# Altium PCB DRV8701EPCB.PcbDoc
Units mil, origin at the board's own origin, x right, y up, seen from the top; angles counter-clockwise.
Board outline 2655 x 1290 mil, 4 copper layers (Top, GND2, POWER, BOTTOM), stack 23.756 mil thick; 40 components, 38 nets, 242 pads, 136 vias.
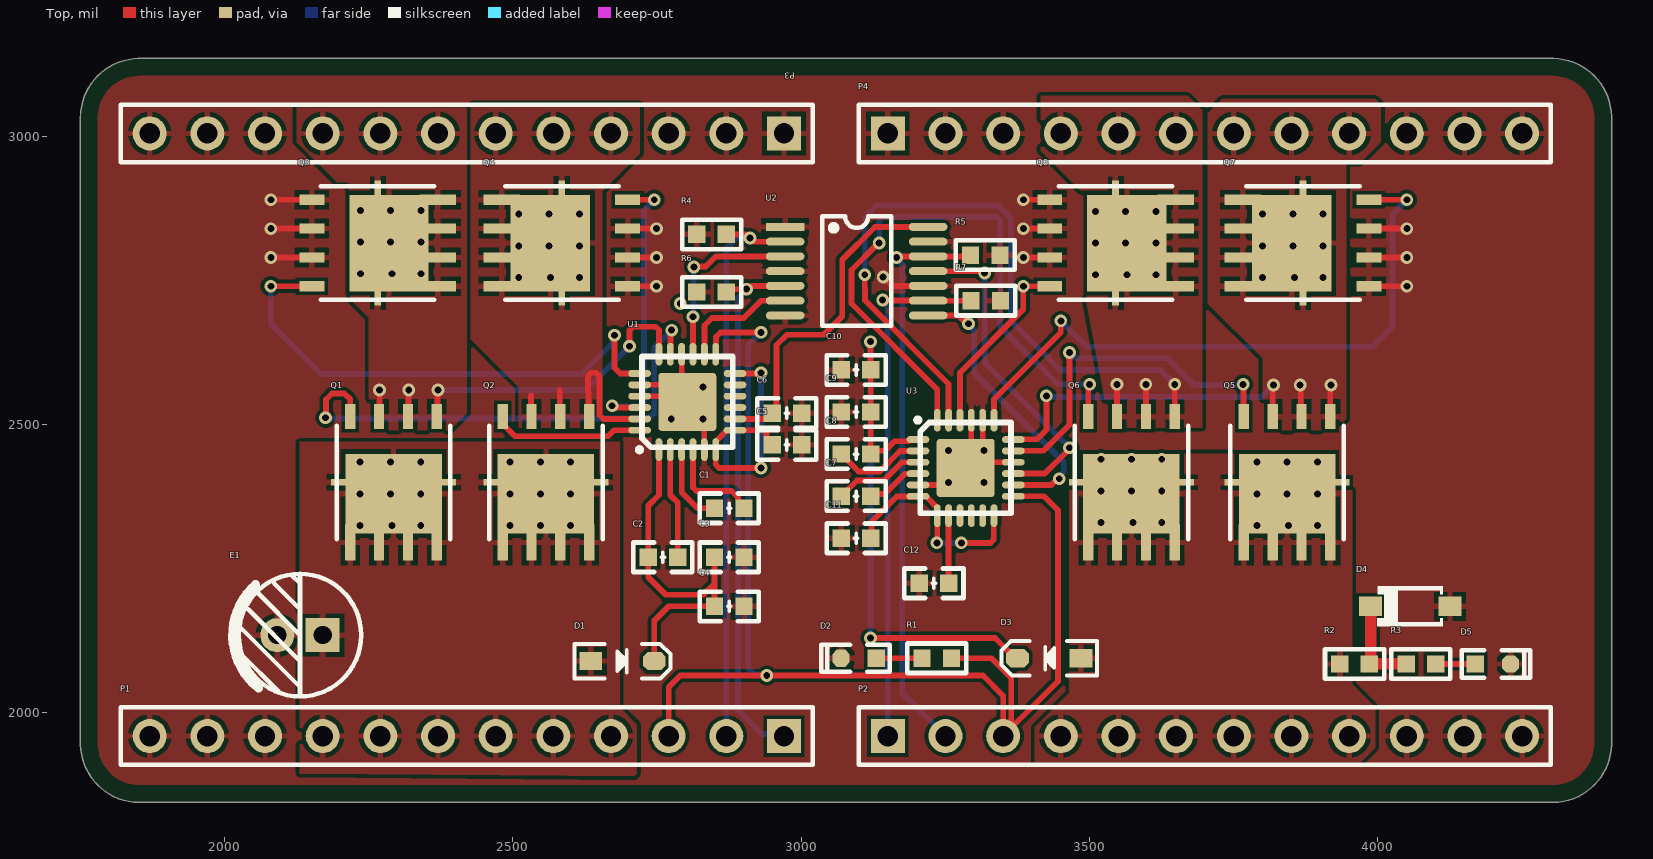
[diagram p0: Top view]
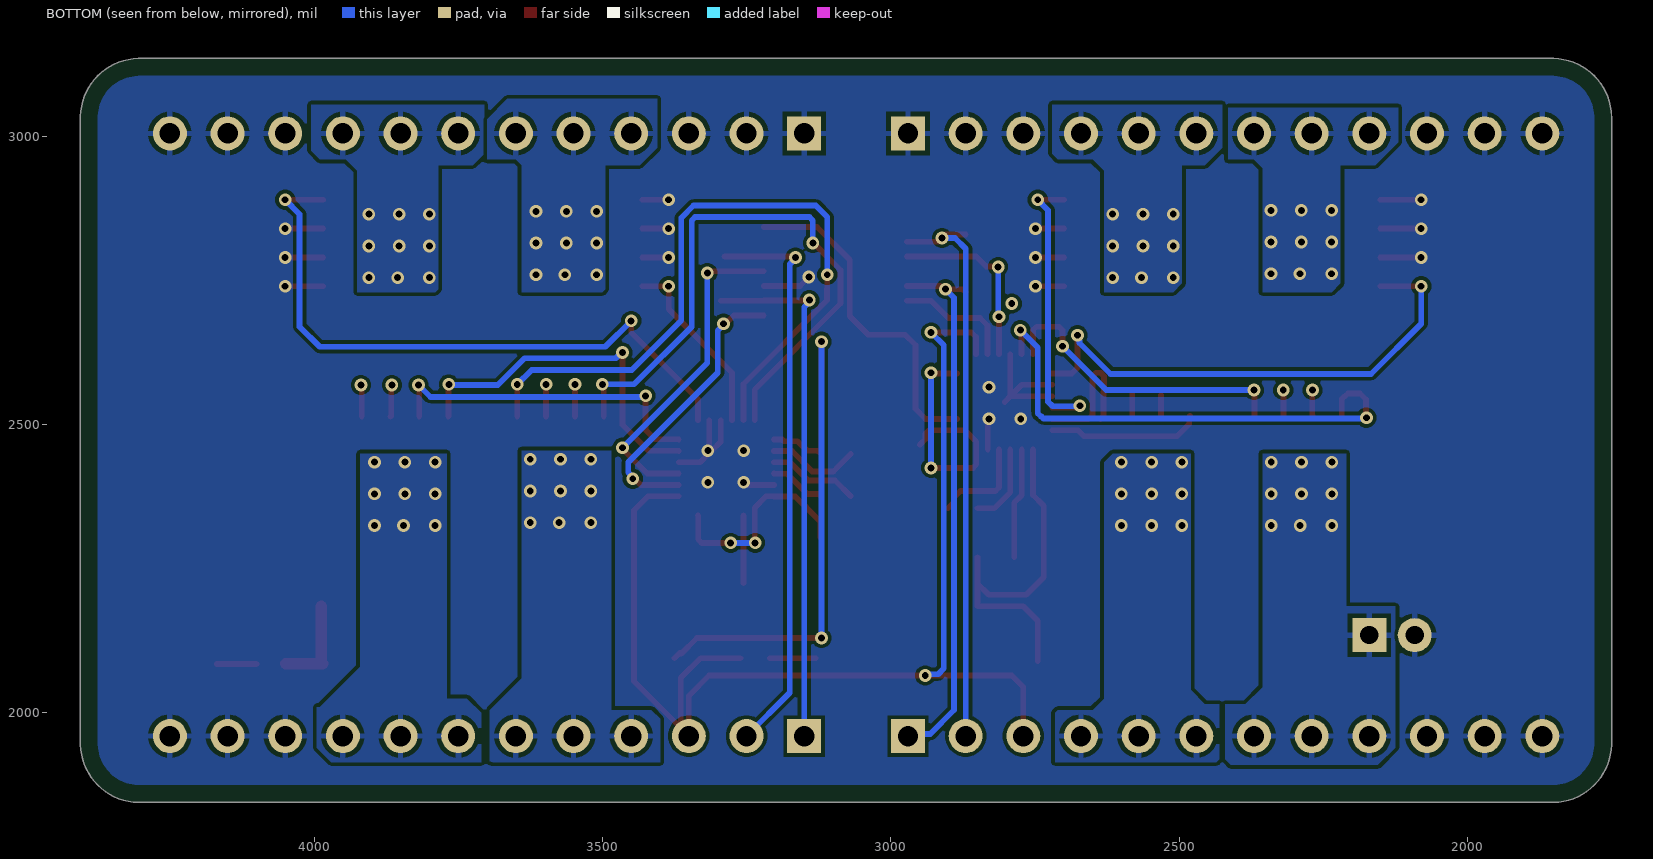
[diagram p1: BOTTOM view, seen from below]
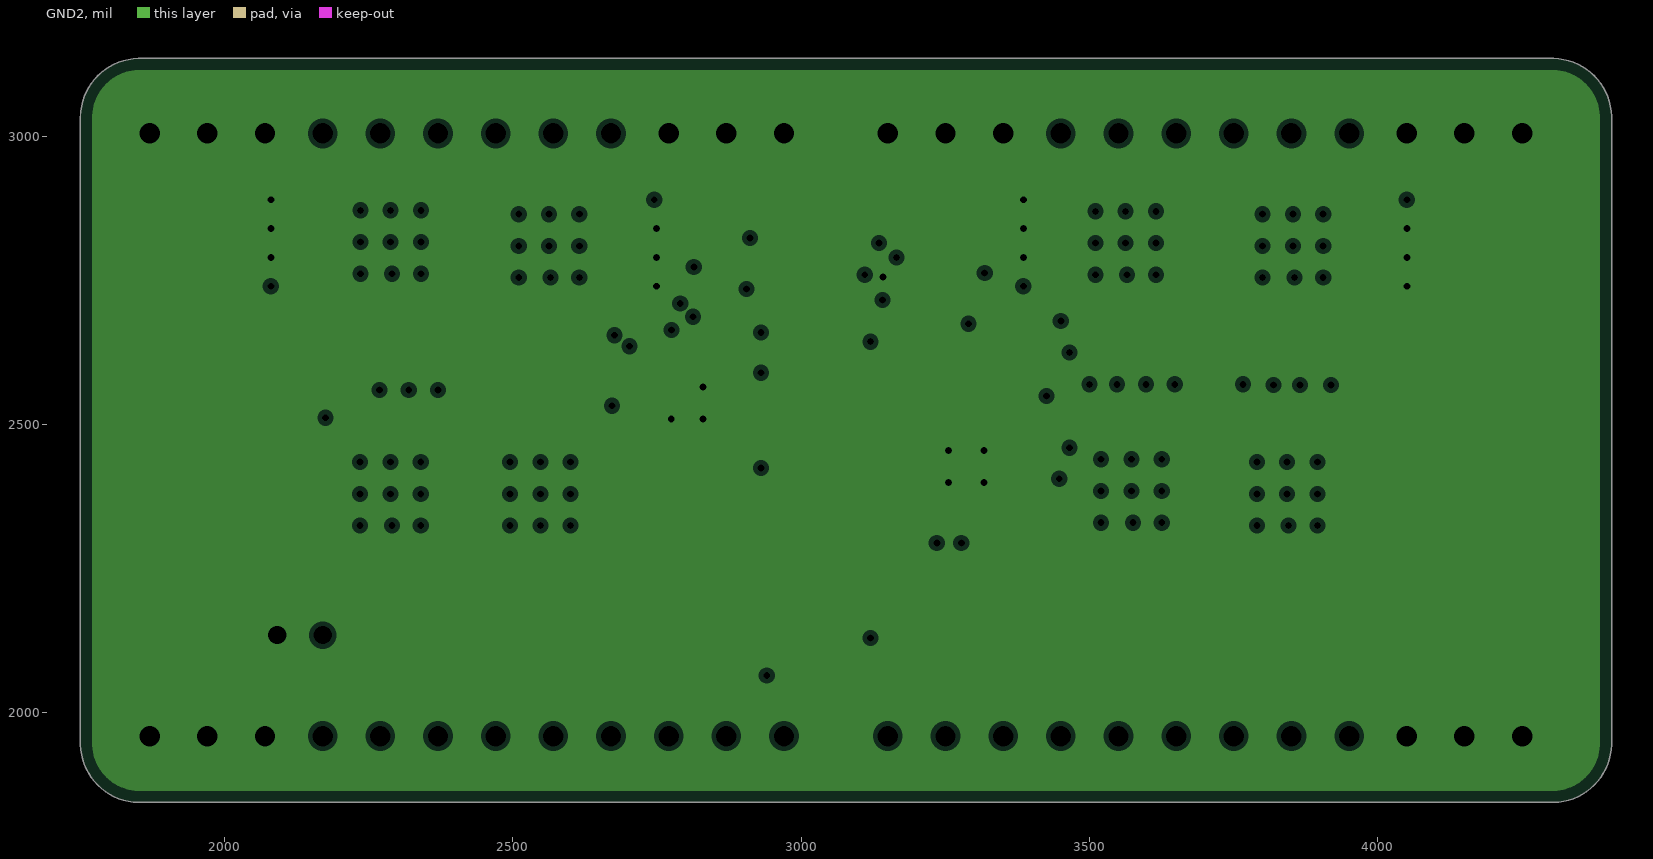
[diagram p2: GND2, clearances drawn from the general rule]
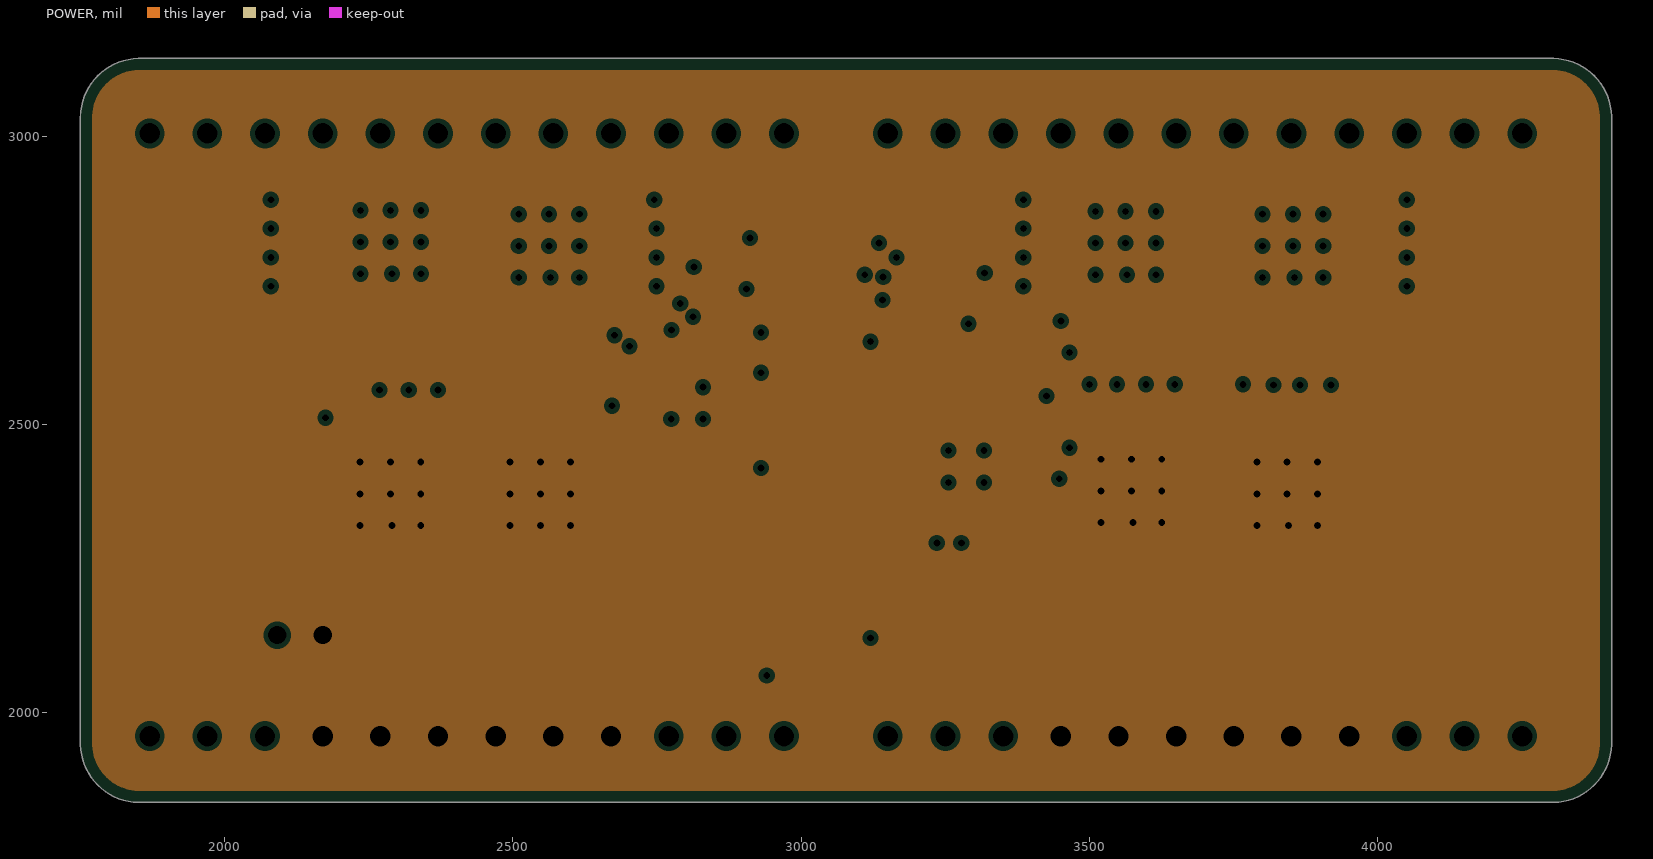
[diagram p3: POWER, clearances drawn from the general rule]
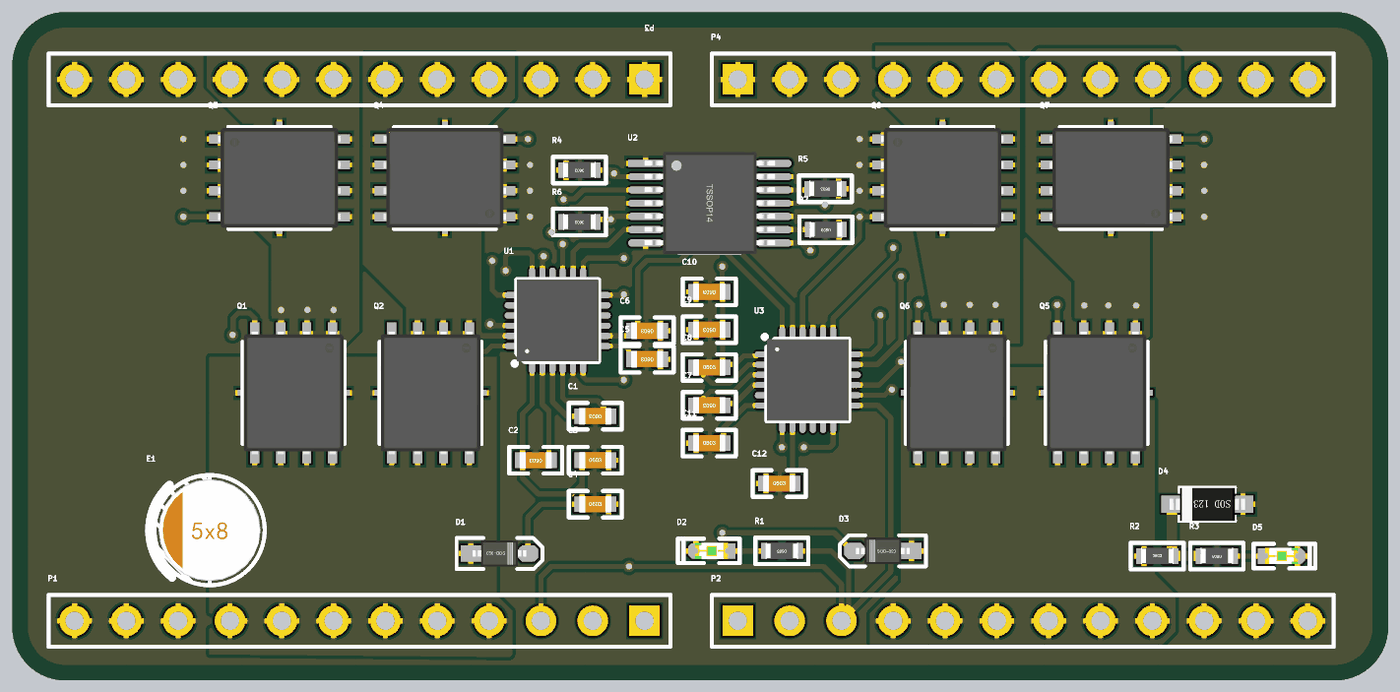
[diagram p4: 3D render of the assembled board from above, using the file's embedded part models]

## Layer stack, top to bottom
Top Solder: solder mask 0.4, Solder Resist, Dk 3.5
Top: signal copper 1.4
Dielectric 2: prepreg 2.8, PP-006, Dk 4.1
GND2: plane copper 1.378, net GND
Dielectric 1: dielectric 12.6, FR-4, Dk 4.8
POWER: plane copper 1.378, net VM
Dielectric 3: prepreg 2.8, PP-006, Dk 4.1
BOTTOM: signal copper 1.4
Bottom Solder: solder mask 0.4, Solder Resist, Dk 3.5

## Board outline
1750,1944.99 1750,3035 cw(c1852.5,3032.5) 1849.99,3135 4305,3135 cw(c4302.5,3032.5) 4405,3035.01 4405,1945 cw(c4302.5,1947.5) 4305.01,1845 1850,1845 cw(c1852.5,1947.5)

## Design rules (kind name [scope] priority, off if disabled: settings)
BoardOutlineClearance [All] p1: gap=30 ignorepadtopadclearanceinfootprint=FALSE
Clearance [All] p1: gap=6 ignorepadtopadclearanceinfootprint=FALSE
PlaneClearance [All] p1: clearance=8
PlaneConnect [All] p1: pad.planeconnectstyle=Direct pad.reliefexpansion=20 pad.reliefentries=4 pad.reliefconductorwidth=10 pad.reliefairgap=10 via.planeconnectstyle=NoConnect via.reliefexpansion=20 via.reliefentries=4 via.reliefconductorwidth=10 via.reliefairgap=10
PolygonConnect PolygonConnect_pad [All vs ISPAD] p1: connectstyle=Relief reliefconductorwidth=10 reliefentries=4 polygonreliefangle="90 Angle" airgapwidth=7.87
PolygonConnect PolygonConnect_via [All vs ISVIA] p2: connectstyle=Direct reliefconductorwidth=10 reliefentries=4 polygonreliefangle="90 Angle" airgapwidth=10
RoutingVias [All] p1: holewidth=28 width=50 viastyle="Through Hole" minholewidth=28 minwidth=50 maxholewidth=28 maxwidth=50
SilkToSolderMaskClearance [IsPad] p1: minsilkscreentomaskgap=2 clearancetoexposedcopper=TRUE
SolderMaskExpansion [All] p1: expansion=4 istentingtop=FALSE
Width [All] p1: maxlimit=10 minlimit=8 preferedwidth=8
Width GND [InNetClass('GND')] p2: maxlimit=60 minlimit=10 preferedwidth=50
Width PWR [InNetClass('POWER')] p3: maxlimit=60 minlimit=10 preferedwidth=50
27 further rules are at their usual default settings.

## Classes and differential pairs
net class POWER: 3V3 DVDD "L  A" "L  B" "R  A" "R  B" VM
net class GND: GND

## Components (designator, comment, footprint, x,y, rotation, side; value= is the part's Value field where it differs from the comment)
C1 "100nF" C0603_L 2874.99,2355 r180 top
C2 "1uF" C0603_L 2760,2270 r180 top
C3 "10uF" C0603_L 2875,2270 r0 top
C4 "100nF" C0603_L 2875,2185 r0 top
C5 "1uF" C0603_L 2975,2465 r180 top
C6 "1uF" C0603_L 2975,2520 r180 top
C7 "100nF" C0603_L 3095.01,2376 r180 top
C8 "1uF" C0603_L 3095.01,2449 r0 top
C9 "10uF" C0603_L 3095,2522 r180 top
C10 "100nF" C0603_L 3095,2595 r180 top
C11 "1uF" C0603_L 3095.01,2303 r0 top
C12 "1uF" C0603_L 3230,2225 r0 top
D1 "1N5819" SOD-323 2690,2090 r0 top
D2 "LED" LED-0603_R 3099.41,2095 r180 top
D3 "1N5819" SOD-323 3430,2095 r180 top
D4 "BZT52C3V3" SOD-123-L 4056.1,2185 r180 top
D5 "LED" LED-0603_R 4199.41,2085 r0 top
E1 "10uF/25V" CT-2.0*5*8-R 2130.63,2135 r0 top
P1 "Header 12" HDR1X12 2970,1960 r180 top
P2 "Header 12" HDR1X12 3150,1960 r0 top
P3 "Header 12" HDR1X12 2970,3005 r180 top
P4 "Header 12" HDR1X12 3150,3005 r0 top
Q1 "TPH1R403NL" DFN5x6 2292.87,2400 r180 top
Q2 "TPH1R403NL" DFN5x6 2557.13,2400 r180 top
Q3 "TPH1R403NL" DFN5x6 2265.31,2815 r270 top
Q4 "TPH1R403NL" DFN5x6 2584.69,2815 r90 top
Q5 "TPH1R403NL" DFN5x6 3842.44,2400 r180 top
Q6 "TPH1R403NL" DFN5x6 3572.56,2400 r180 top
Q7 "TPH1R403NL" DFN5x6 3870,2815 r90 top
Q8 "TPH1R403NL" DFN5x6 3545,2815 r270 top
R1 "330R" R0603_L 3235,2095 r180 top
R2 "2.2K" R0603_L 3959.41,2085 r0 top
R3 "1K" R0603_L 4074.41,2085 r180 top
R4 "10K" R0603_L 2844.41,2830 r180 top
R5 "10K" R0603_L 3319,2794 r180 top
R6 "10K" R0603_L 2844.41,2730 r180 top
R7 "10K" R0603_L 3320,2715 r180 top
U1 "DRV8701E" QFN24-4x4 2802.32,2539.53 r90 top
U2 "SN74HC125PWR" TSSOP14 3095.98,2766.18 r0 top
U3 "DRV8701E" QFN24-4x4 3285,2425 r0 top

## Footprints (in the part's own frame and the unit in brackets; to place one, negate y for a bottom-side part, rotate by r counter-clockwise, add the part's x,y. Pads: shape width x height; smd on the part's side, far side on the other; paste and mask are expansions set on the pad)
C0603_L [mil]
  rect 30x30 smd: 1(-25.59,0) 2(25.59,0)
  silkscreen extent -51,-26 51,26, body extent -31,-16 32,16, height 33
CT-2.0*5*8-R [mm]
  rect 1.5x1.5 hole 0.8: 1(1,0)
  round 1.5 hole 0.8: 2(-1,0)
  silkscreen extent -2.96,-2.7 2.7,2.7, body extent -2.5,-2.49 2.5,2.49, height 8.06
DFN5x6 [mm]
  rect 0.45x1.6 smd: 1(-1.905,2.65) 1(-0.635,2.65) 1(0.635,2.65) 1(1.905,2.65)
  rect 5.5x0.3 smd: 1(0,0)
  rect 4.25x3.5 smd: 1(0,0.5)
  rect 0.45x1.1 smd: 2(1.905,-2.9) 3(-1.905,-2.9) 3(-0.635,-2.9) 3(0.635,-2.9)
  silkscreen extent -2.5,-2.5 2.5,2.5, body extent -2.45,-3 2.45,3, height 1
HDR1X12 [mm] "Connector; Header; 12 Position"
  rect 1.5x1.5 hole 0.9: 1(0,0)
  round 1.5 hole 0.9: 2(2.54,0) 3(5.08,0) 4(7.62,0) 5(10.16,0) 6(12.7,0) 7(15.24,0) 8(17.78,0) 9(20.32,0) 10(22.86,0) 11(25.4,0) 12(27.94,0)
  silkscreen extent -1.27,-1.27 29.21,1.27
LED-0603_R [mil]
  rect 30x30 smd: 1(-30.59,0)
  oct 30x30 smd: 2(30.59,0)
  silkscreen extent -54,-24 65,24, body extent -32,-16 31,16, height 24
QFN24-4x4 [mm]
  rrect10% 2.55x2.55 smd: 0(0,0)
  oval 1x0.3 smd: 1(-2.1,1.25) 2(-2.1,0.75) 3(-2.1,0.25) 4(-2.1,-0.25) 5(-2.1,-0.75) 6(-2.1,-1.25) 13(2.1,-1.25) 14(2.1,-0.75) 15(2.1,-0.25) 16(2.1,0.25) 17(2.1,0.75) 18(2.1,1.25)
  oval 0.3x1 smd: 7(-1.25,-2.1) 8(-0.75,-2.1) 9(-0.25,-2.1) 10(0.25,-2.1) 11(0.75,-2.1) 12(1.25,-2.1) 19(1.25,2.1) 20(0.75,2.1) 21(0.25,2.1) 22(-0.25,2.1) 23(-0.75,2.1) 24(-1.25,2.1)
  silkscreen extent -2.21,-2 2,2.21, body extent -2,-2 2,2, height 0.9
R0603_L [mil]
  rect 30x30 smd: 1(-25.59,0) 2(25.59,0)
  silkscreen extent -51,-26 51,26, body extent -31,-16 32,16, height 16
SOD-123-L [mm]
  rect 1x0.85 smd: A(-1.75,0) K(1.75,0)
  silkscreen extent -1.44,-0.9 1.47,0.9, body extent -1.85,-0.8 1.85,0.8, height 1.2
SOD-323 [mm]
  rect 1x0.8 smd: 1(-1.4,0)
  oct 1x0.8 smd: 2(1.4,0)
  silkscreen extent -2.11,-0.76 2.11,0.76, body extent -1.32,-0.65 1.32,0.65, height 0.95
TSSOP14 [mm]
  rect 1.7x0.35 smd: 1(-3.15,1.95)
  oval 1.7x0.35 smd: 2(-3.15,1.3) 3(-3.15,0.65) 4(-3.15,0) 5(-3.15,-0.65) 6(-3.15,-1.3) 7(-3.15,-1.95) 8(3.15,-1.95) 9(3.15,-1.3) 10(3.15,-0.65) 11(3.15,0) 12(3.15,0.65) 13(3.15,1.3) 14(3.15,1.95)
  silkscreen extent -1.52,-2.41 1.52,2.41, body extent -3.2,-2.49 3.2,2.51, height 1.03

## Part data
C1 C2 C3 C4 C5 C6 C7 C8 C9 C10 C11 C12: library part C-SMD, "贴片电容", BOM名称=无极性贴片电容
D1 D3: "肖特基二极管", BOM名称=肖特基二极管
D2 D5: library part LED_SMD, "贴片发光二极管"
D4: library part "Diode Zen", "3.3V稳压二极管", Price(RMB)=0.000, Published=8-Jun-2000, Publisher="Altium Limited", Revision="July-2002: Re-released for DXP Platform."
E1: library part C-CS, "直插固态电容", BOM名称=直插固态电容
P1 P2 P3 P4: "Header, 12-Pin", LatestRevisionDate=17-Jul-2002, LatestRevisionNote="Re-released for DXP Platform.", Publisher="Altium Limited"
Q1 Q2 Q3 Q4 Q5 Q6 Q7 Q8: "N沟道MOS"
R1 R2 R3 R4 R5 R6 R7: library part R-SMD, "贴片电阻", BOM名称=贴片电阻
U1 U3: "DRV8701E Ti全桥驱动芯片"
U2: "三态输出的四路缓冲器"

## Via types
v1: diameter 22, hole 12, Top to BOTTOM, tented both sides, 135 vias
v2: diameter 22/22 (per signal layer), hole 12, Top to BOTTOM, tented both sides, 1 vias

## Nets (pads, with @x,y where several pads share a name; then routed paths per layer and width w, separated by ;. In a path a pad name is that pad's centre, name@x,y a point inside that pad or via, vN(x,y) a via of type N, cw(c..) or ccw(c..) an arc to the next point about the centre after c; other vN are vias at no path point)
3V3: D4.K R2.2 R3.2 | length 164.7
  Top w10: R2.2 R2.2@3987.21,2087.21
  Top w20: R2.2 R3.2 ; R2.2@3987.21,2087.21 D4.K
DVDD: C6.2 U1.8 U2.14 | length 595
  Top w10: U1.8 2939.41,2510 2957,2527.59 2957,2638 2975,2656 3039,2656 3071,2688 3071,2786 3127.95,2842.95 U2.14
GND: C3.2 C4.2 C5.1 C6.1 C9.2 C10.2 C11.1 C12.1 D2.2 D4.A D5.2 E1.2 P1.10 P1.11 P1.12 P2.10 P2.11 P2.12 P3.1 P3.2 P3.3 P3.10 P3.11 P3.12 P4.1 P4.2 P4.3 P4.10 P4.11 P4.12 Q3.3 Q4.3 Q7.3 Q8.3 R4.2 R5.1 R6.2 R7.1 U1.0 U1.5 U1.16 U1.20 U1.21 U2.1 U2.4 U2.7 U2.10 U2.13 U3.0 U3.5 U3.16 U3.20 U3.21 | length 1315.2
  Top w10: v1(2080,2890) Q3.3@2151.14,2890 ; v1@2085,2790 Q3.3@2151.14,2790 ; v1@2085,2840 Q3.3@2151.14,2840 ; Q4.3@2698.86,2740 v1(2749,2740) ; Q4.3@2698.86,2790 v1(2749,2790) ; Q4.3@2698.86,2840 v1(2749,2840) ; U1.21 U1.0@2792.48,2549.37 ; U1.20 2772.8,2569.06 U1.0@2792.48,2549.37 ; U1.16 U1.0@2792.48,2549.37 ; U1.0 U1.0@2792.48,2549.37 ; v1(2829.41,2510) 2831.85,2507.56 U1.5 ; v1(3142,2756) 3157.41,2740.59 U2.10 ; U3.5 3250.47,2395.47 v1(3255,2400) ; U3.21 3294.84,2470.2 3310.04,2455 v1(3317,2455) ; U3.20 3314.53,2457.47 v1(3317,2455) ; U3.16 3330.2,2434.84 3317,2448.04 v1(3317,2455) ; v1(3385,2790) Q8.3@3430.83,2790 ; v1(3385,2840) Q8.3@3430.83,2840 ; v1(3385,2890) Q8.3@3430.83,2890 ; Q7.3@3984.17,2740 v1(4050,2740) ; Q7.3@3984.17,2790 v1@4055,2790 ; Q7.3@3984.17,2840 v1@4055,2840
  other v1: 3317,2400 3255,2455 2774.41,2510 2829.41,2565 2080,2790 4050,2790 2080,2840 4050,2840
"L  A": P3.4 P3.5 P3.6 Q2.3 Q4.1 U1.23 | length 320.3
  Top w10: 2531.06,2551.06 2531.06,2515.24 Q2.3@2532.13,2514.17 ; 2581.06,2560 2581.06,2515.24 Q2.3@2582.13,2514.17 ; 2630,2560 2630,2584.14 2635.86,2590 2644.14,2590 2650,2584.14 2650,2516.96 2656.96,2510 U1.23 ; 2631.06,2556.06 2631.06,2515.24 2632.13,2514.17 Q2.3@2635.98,2510
  other v1: 2510,2755 2565,2755 2615,2755 2510,2810 2562.5,2810 2615,2810 2510,2865 2562.5,2865 2615,2865
"L  B": P3.7 P3.8 P3.9 Q1.3 Q3.1 U1.18 | length 624.8
  Top w10: Q1.3@2267.87,2514.17 2268.94,2515.24 v1@2268.94,2558.94 ; Q1.3@2317.87,2514.17 2318.94,2515.24 v1@2318.94,2558.94 ; Q1.3@2367.87,2514.17 2368.94,2515.24 v1@2368.94,2558.94 ; v1(2702,2636) 2702,2663.64 2708.36,2670 2747.25,2670 2753.11,2664.14 U1.18
  BOTTOM w10: v1(2370,2560) 2626,2560 v1(2702,2636)
  other v1: 2268.58,2560 2319.29,2560 2235.35,2761.73 2290.35,2761.73 2340.35,2761.73 2235.35,2816.73 2287.85,2816.73 2340.35,2816.73 2235.35,2871.73 2287.85,2871.73 2340.35,2871.73
L_EN: U1.14 U2.6 | length 207.6
  Top w10: U1.14 2832.2,2622.55 2832.2,2672.2 2845,2685 2900,2685 2930,2715 U2.6
L_EN_IN: P1.1 R6.1 U2.5 | length 941.2
  Top w10: R6.1 2875,2735 2908.25,2735 2913.84,2740.59 U2.5
  BOTTOM w10: v1(2905,2735) 2890,2720 2890,2005 2931.33,1963.67 2966.33,1963.67 P1.1
L_PH: U1.15 U2.3 | length 321.9
  Top w10: U1.15 v1(2812.17,2687.17) v1@2815,2690 ; v1(2813.58,2773.58) 2814.47,2774.47 2834.47,2774.47 2851.77,2791.77 U2.3
  BOTTOM w10: v1(2812.17,2687.17) 2813.58,2688.58 v1(2813.58,2773.58)
L_PH_IN: P1.2 R4.1 U2.2 | length 1001
  Top w10: R4.1 2904.72,2830.01 v1(2911.04,2823.68) 2917.36,2817.36 U2.2
  BOTTOM w10: P1.2 2870,2805 2888.68,2823.68 v1(2911.04,2823.68)
NetC1_1: C1.1 U1.4 | length 174.3
  Top w10: U1.4 2812.17,2390.86 2818.02,2385 2879.14,2385 2890.59,2373.55 2890.59,2365 C1.1
NetC1_2: C1.2 U1.3 | length 142.7
  Top w10: U1.3 2792.48,2382.52 2820,2355 C1.2
NetC2_1: C2.1 U1.2 | length 192.1
  Top w10: U1.2 2772.8,2377.8 2785.59,2365 C2.1
NetC2_2: C2.2 C3.1 C4.1 D1.2 U1.1 | length 634.4
  Top w10: D1.2 2745.12,2160.12 2770,2185 C4.1 2849.41,2224.41 ; U1.1 2753.11,2378.11 2734.41,2359.41 C2.2 2734.41,2235.59 2765,2205 2830,2205 2849.41,2224.41 ; C3.1 2849.41,2224.41
NetC5_2: C5.2 U1.6 U1.7 U1.12 | length 453.2
  Top w10: U1.12 2928.74,2588.74 v1(2930,2590) ; v1(2930,2425) 2857.39,2425 2851.54,2430.86 2851.54,2470.63 2871.22,2490.31 2933.55,2490.31 2939.41,2484.46 2939.41,2475 C5.2
  BOTTOM w10: v1(2930,2425) v1(2930,2590)
NetC7_1: C7.1 U3.4 | length 97.9
  Top w10: C7.1 3124.34,2379.74 3144.74,2379.74 3179.81,2414.81 3201.98,2414.81 U3.4
NetC7_2: C7.2 U3.3 | length 157.3
  Top w10: C7.2 3096.42,2403 3143,2403 3174.84,2434.84 U3.3
NetC8_1: C8.1 U3.2 | length 160.1
  Top w10: C8.1 3090.59,2427.82 3099.38,2419 3136.15,2419 3171.33,2454.18 3201.98,2454.18 U3.2
NetC8_2: C8.2 C9.1 C10.1 D3.2 U3.1 | length 1069.4
  Top w10: v2(3120,2130) 3335.94,2130 D3.2@3363.28,2102.66 ; v1(3120,2643.89) 3120,2595.6 C10.1 C9.1 C8.2 3126.33,2454.74 3144.74,2454.74 3161.43,2471.43 3185.27,2471.43 3188.05,2474.21 U3.1 ; D3.2@3365.25,2104.63 D3.2
  BOTTOM w10: v2(3120,2130) v1(3120,2643.89)
NetC11_2: C11.2 U3.6 U3.7 U3.12 | length 371.9
  Top w10: C11.2@3122.14,2304.54 3122.14,2332.14 3134.29,2344.29 3134.45,2344.29 3146.6,2356.44 3146.6,2356.6 3165.44,2375.44 3201.98,2375.44 U3.6 3216.1,2375.79 3235.79,2356.1 U3.7 3235.79,2295.79 v1(3235,2295) ; v1(3277.47,2295) 3328.01,2295 3333.87,2300.86 3333.87,2341.98 U3.12
  BOTTOM w10: v1(3235,2295) v1(3277.47,2295)
NetC12_2: C12.2 U3.8 | length 117.3
  Top w10: C12.2@3255.47,2225 U3.8
NetD2_1: D2.1 R1.2 | length 79.4
  Top w10: D2.1 R1.2
NetD5_1: D5.1 R3.1 | length 68.8
  Top w10: R3.1 D5.1
NetQ1_2: Q1.2 U1.17 | length 885.4
  Top w10: v1(2175,2512) 2175.88,2512.88 2175.88,2543.88 2186,2554 2207.07,2554 2214.69,2547.4 2217.87,2544.22 Q1.2 ; U1.17 2773.14,2622.55 2773.14,2661.93 v1(2775.11,2663.9)
  BOTTOM w10: v1(2175,2512) 2176.18,2510.82 2734.93,2510.82 2738.24,2514.14 2739.14,2514.14 2744.44,2519.44 ccw(c2725,2524.14) 2745,2524.14 2745,2633.79 v1(2775.11,2663.9)
NetQ2_2: Q2.2 U1.24 | length 264.9
  Top w10: Q2.2@2481.06,2515.24 Q2.2 2482.13,2501.38 2503.5,2480 2665,2480 2675.31,2490.31 U1.24
NetQ3_2: Q3.2 U1.19 | length 905.9
  Top w10: v1(2080,2740) Q3.2 ; v1(2676,2655) 2676,2598.6 2685.86,2588.74 U1.19
  BOTTOM w10: v1(2080,2740) 2080,2675 2167,2588 2619.01,2588 2672.69,2641.69 2672.69,2644.85 2673.7,2645.86 2673.7,2652.7 v1(2676,2655)
NetQ4_2: Q4.2 U1.22 | length 511.3
  Top w10: v1(2672,2532.82) 2675.25,2532.82 2678.39,2529.69 U1.22 ; Q4.2 v1(2745,2890)
  BOTTOM w10: v1(2672,2532.82) 2672.82,2532 2719.14,2532 2727,2539.86 2727,2872 v1(2745,2890)
NetQ5_2: Q5.2 U3.17 | length 622.6
  Top w10: U3.17 3368.02,2454.87 3419.87,2454.87 3465,2500 v1(3465,2625) ; v1(3766.22,2570) 3766.83,2569.39 3766.83,2514.78 Q5.2
  BOTTOM w10: v1(3465,2625) 3466.86,2625 3476.86,2615 3635,2615 3681.28,2568.72 3764.94,2568.72 v1(3766.22,2570)
NetQ6_2: Q6.2 U3.24 | length 1081.7
  Top w10: v1@3132.5,2817.5 3132.5,2813.61 3087,2768.11 3087,2710 3235.79,2561.21 U3.24 ; Q6.2 3497.56,2567.56 v1(3500,2570)
  BOTTOM w10: v1(3135,2815) 3135,2854.14 3140.86,2860 3339.14,2860 3345,2854.14 3345,2670 3445,2570 v1(3500,2570)
NetQ7_2: Q7.2 U3.19 | length 1124.6
  Top w10: U3.19 3334.21,2544.21 3450,2660 v1(3450,2680) ; Q7.2 v1(4050,2890)
  BOTTOM w10: v1(3450,2680) 3495,2635 3990,2635 4025,2670 4025,2865 v1(4050,2890)
NetQ8_2: Q8.2 U3.22 | length 323.6
  Top w10: U3.22 3275.16,2590.16 3385,2700 v1(3385,2740) Q8.2
nSLEEP: P1.3 P2.3 R1.1 U1.13 U3.13 | length 2227.4
  Top w10: P1.3 2770,2045 2790,2065 3315,2065 3350,2030 P2.3@3350,1973.27 ; U1.13 2851.88,2622.55 2851.88,2651.88 2860,2660 v1(2930,2660) ; R1.1 3330,2095 3363.99,2061.01 3363.99,1987.26 P2.3@3350,1973.27 ; U3.13 3420.79,2375.79 3445,2351.57 3445,2055 P2.3 P2.3@3350,1973.27
  BOTTOM w10: v1(2930,2660) 2908,2638 2908,2077 2917.7,2067.3 2937.7,2067.3 v1(2940,2065)
"R  A": P4.4 P4.5 P4.6 Q6.3 Q8.1 U3.23 | length 1376.4
  Top w10: v1(3110,2760) 3110.32,2715.68 3255.47,2570.53 U3.23 ; Q6.3@3547.56,2514.17 v1(3547.56,2570) 3547.56,2572.56 v1@3550,2575 ; Q6.3@3597.56,2514.17 v1(3597.56,2570) 3597.56,2572.56 v1@3600,2575 ; Q6.3@3647.56,2514.17 v1(3647.56,2570) 3647.56,2572.56 v1@3650,2575
  BOTTOM w10: v1(3110,2760) 3110,2860 3130,2880 3341.77,2880 3363,2858.77 3363,2680.89 3448.89,2595 3622.56,2595 v1(3647.56,2570)
  other v1: 3510,2760 3565,2760 3615,2760 3510,2815 3562.5,2815 3615,2815 3510,2870 3562.5,2870 3615,2870
"R  B": P4.7 P4.8 P4.9 Q5.3 Q7.1 U3.18 | length 697
  Top w10: U3.18 3368.27,2474.8 3408.69,2474.8 3425,2491.11 v1(3425,2550) ; Q5.3@3817.44,2514.17 3817.44,2567.44 v1(3818.72,2568.72) v1@3820,2570 ; v1@3865,2570 3866.22,2568.78 3866.22,2515.39 Q5.3@3867.44,2514.17 ; Q5.3@3917.44,2514.17 3917.44,2567.44 v1@3920,2570
  BOTTOM w10: v1(3425,2550) 3427,2548 3798,2548 v1(3818.72,2568.72)
  other v1: 3865,2568.72 3918.72,2568.72 3800,2755 3855,2755 3905,2755 3800,2810 3852.5,2810 3905,2810 3800,2865 3852.5,2865 3905,2865
R_EN: U2.8 U3.14 | length 500.4
  Top w10: U2.8 3272.34,2689.41 3286.75,2675 v1(3290,2675) ; U3.14 3433.34,2395.47 3444.05,2406.18 v1(3447.29,2406.18)
  BOTTOM w10: v1(3290,2675) 3290,2673.14 3300,2663.14 3300,2590 3455,2435 3455,2417.13 3447.29,2409.43 v1(3447.29,2406.18)
R_EN_IN: P2.1 R7.2 U2.9 | length 913.6
  Top w10: v1(3141.06,2716.06) 3141.58,2715.53 3219.47,2715.53 U2.9 R7.2
  BOTTOM w10: v1(3141.06,2716.06) 3141.06,2712.81 3150,2703.87 P2.1
R_PH: U2.11 U3.15 | length 580.3
  Top w10: U2.11 3311.57,2766.18 3314.75,2763 v1(3318,2763) ; U3.15 3422.16,2415.16 3465,2458 v1(3465,2460)
  BOTTOM w10: v1(3318,2763) 3318,2607 v1(3465,2460)
R_PH_IN: P2.2 R5.2 U2.12 | length 989.2
  Top w10: v1(3165,2790) 3166.77,2791.77 U2.12 R5.2@3288.24,2791.77
  BOTTOM w10: v1(3165,2790) 3165,2788.14 3175,2778.14 3175,2035 P2.2
VM: D1.1 D3.1 E1.1 P1.4 P1.5 P1.6 P1.7 P1.8 P1.9 P2.4 P2.5 P2.6 P2.7 P2.8 P2.9 Q1.1 Q2.1 Q5.1 Q6.1 R2.1
  other v1: 2235,2325 2290,2325 2340,2325 2495,2325 2547.5,2325 2600,2325 3790,2325 3845,2325 3895,2325 3520,2330 3575,2330 3625,2330 2235,2380 2287.5,2380 2340,2380 2495,2380 2547.5,2380 2600,2380 3790,2380 3842.5,2380 3895,2380 3520,2385 3572.5,2385 3625,2385 2235,2435 2287.5,2435 2340,2435 2495,2435 2547.5,2435 2600,2435 3790,2435 3842.5,2435 3895,2435 3520,2440 3572.5,2440 3625,2440
pads on no net: U1.9 U1.10 U1.11 U3.9 U3.10 U3.11
copper on no net:
  other v1: 2790,2710

## Polygon pours and split planes (outlines as drawn)
GND on BOTTOM "GND_L04_P033" (solid, remove dead copper, pour order 33): 1750,1944.99 1750,3035 cw(c1852.5,3032.5) 1849.99,3135 4305,3135 cw(c4302.5,3032.5) 4405,3035.01 4405,1945 cw(c4302.5,1947.5) 4305.01,1845 1850,1845 cw(c1852.5,1947.5)
VM on BOTTOM "NONET_L-01_P-001" (solid, remove dead copper, pour order 28): 2430,2015 2455,2015 2480,2040 2480,2450 2615,2450 2630,2435 2630,2025 2650,2005 2710,2005 2715,2000 2715,1915 2435,1915 2430,1920 2435,1915 2430,1920
VM on BOTTOM "NONET_L-01_P-001" (solid, remove dead copper, pour order 27): 2210,2450 2210,2185 2125,2185 2125,1940 2155,1910 2410,1910 2420,1920 2420,2015 2385,2015 2355,2045 2355,2450
"L  B" on BOTTOM "NONET_L-01_P-001" (solid, remove dead copper, pour order 26): 2120,3050 2120,2990 2160,2950 2220,2950 2220,2745 2235,2730 2355,2730 2355,2945 2370,2960 2415,2960 2415,3050
"L  A" on BOTTOM "NONET_L-01_P-001" (solid, remove dead copper, pour order 25): 2425,2980 2455,2950 2495,2950 2495,2745 2510,2730 2630,2730 2630,2940 2650,2960 2710,2960 2720,2970 2720,3055 2425,3055 2425,3030
"R  B" on BOTTOM "NONET_L-01_P-001" (solid, remove dead copper, pour order 23): 3705,3055 3705,2970 3725,2950 3785,2950 3785,2735 3790,2730 3925,2730 3925,2940 3945,2960 3990,2960 4005,2975 4005,3055
"R  A" on BOTTOM "NONET_L-01_P-001" (solid, remove dead copper, pour order 22): 3405,3065 3405,2980 3435,2950 3495,2950 3495,2735 3500,2730 3640,2730 3640,2950 3650,2960 3700,2960 3700,3030 3665,3065
VM on BOTTOM "NONET_L-01_P-001" (solid, remove dead copper, pour order 21): 3770,2450 3770,2025 3735,2025 3710,2000 3710,1915 3970,1915 3995,1940 3995,2010 3990,2010 3920,2080 3920,2450
VM on BOTTOM "NONET_L-01_P-001" (solid, remove dead copper, pour order 19): 3485,2455 3485,2005 3415,2005 3400,1990 3400,1915 3690,1915 3695,1910 3695,2005 3640,2060 3640,2455
GND on Top "GND_L01_P032" (solid, remove dead copper, pour order 32): 1750,1944.99 1750,3035 cw(c1852.5,3032.5) 1849.99,3135 4305,3135 cw(c4302.5,3032.5) 4405,3035.01 4405,1945 cw(c4302.5,1947.5) 4305.01,1845 1850,1845 cw(c1852.5,1947.5)
"L  A" on Top "NONET_L-01_P-001" (solid, remove dead copper, pour order 14): 2425,3055 2425,2650 2475,2600 2510,2565 2510,2495 2635,2495 2655,2515 2655,2905 2720,2970 2720,3055
VM on Top "NONET_L-01_P-001" (solid, remove dead copper, pour order 5): 3465,2450 3465,2035 3405,1975 3405,1915 3970,1915 3995,1940 3995,2010 3955,2050 3955,2450
"R  B" on Top "NONET_L-01_P-001" (solid, remove dead copper, pour order 17): 3730,3065 3705,3040 3705,2710 3800,2615 3800,2490 3925,2490 3945,2510 3945,2955 3970,2955 4005,2990 4005,3055 3995,3065 3725,3065
"R  A" on Top "NONET_L-01_P-001" (solid, remove dead copper, pour order 3): 3535,2495 3695,2495 3695,3045 3670,3070 3415,3070 3415,2975 3490,2900 3490,2735.31
"L  B" on Top "NONET_L-01_P-001" (solid, remove dead copper, pour order 13): 2125,3050 2125,2990 2195,2920 2215,2920 2215,2720 2250,2685 2250,2490 2390,2490 2420,2520 2420,3050
VM on Top "NONET_L-01_P-001" (solid, remove dead copper, pour order 0): 2130,2470 2685,2470 2685,2010 2715,1980 2715,1895 2710,1890 2130,1895.04
VM on POWER (split plane): 4310.59,3114.63 4318.6,3113.44 4326.46,3111.48 4334.08,3108.75 4341.4,3105.28 4348.35,3101.12 4354.86,3096.3 4360.86,3090.86 4366.3,3084.86 4371.12,3078.35 4375.28,3071.4 4378.75,3064.08 4381.48,3056.46 4383.44,3048.6 4384.63,3040.59 4384.91,3035.03 4384.9,3035.01 4384.9,1945 4384.91,1944.97 4384.63,1939.41 4383.44,1931.4 4381.48,1923.54 4378.75,1915.91 4375.28,1908.59 4371.12,1901.65 4366.3,1895.14 4360.86,1889.14 4354.86,1883.7 4348.35,1878.88 4341.4,1874.71 4334.08,1871.25 4326.46,1868.52 4318.6,1866.55 4310.59,1865.36 4305.03,1865.09 4305.01,1865.09 1850,1865.1 1849.97,1865.09 1844.41,1865.37 1836.4,1866.56 1828.54,1868.52 1820.91,1871.25 1813.59,1874.72 1806.65,1878.88 1800.14,1883.7 1794.14,1889.14 1788.7,1895.14 1783.88,1901.65 1779.71,1908.6 1776.25,1915.92 1773.52,1923.54 1771.55,1931.4 1770.36,1939.41 1770.09,1944.97 1770.09,1944.99 1770.1,3035 1770.09,3035.02 1770.37,3040.59 1771.56,3048.6 1773.52,3056.46 1776.25,3064.08 1779.72,3071.4 1783.88,3078.35 1788.7,3084.86 1794.14,3090.86 1800.14,3096.3 1806.65,3101.12 1813.6,3105.28 1820.92,3108.75 1828.54,3111.48 1836.4,3113.44 1844.41,3114.63 1849.97,3114.91 1849.99,3114.9 4305,3114.9 4305.02,3114.91
GND on GND2 (split plane): 4310.59,3114.63 4318.6,3113.44 4326.46,3111.48 4334.08,3108.75 4341.4,3105.28 4348.35,3101.12 4354.86,3096.3 4360.86,3090.86 4366.3,3084.86 4371.12,3078.35 4375.28,3071.4 4378.75,3064.08 4381.48,3056.46 4383.44,3048.6 4384.63,3040.59 4384.91,3035.03 4384.9,3035.01 4384.9,1945 4384.91,1944.97 4384.63,1939.41 4383.44,1931.4 4381.48,1923.54 4378.75,1915.91 4375.28,1908.59 4371.12,1901.65 4366.3,1895.14 4360.86,1889.14 4354.86,1883.7 4348.35,1878.88 4341.4,1874.71 4334.08,1871.25 4326.46,1868.52 4318.6,1866.55 4310.59,1865.36 4305.03,1865.09 4305.01,1865.09 1850,1865.1 1849.97,1865.09 1844.41,1865.37 1836.4,1866.56 1828.54,1868.52 1820.91,1871.25 1813.59,1874.72 1806.65,1878.88 1800.14,1883.7 1794.14,1889.14 1788.7,1895.14 1783.88,1901.65 1779.71,1908.6 1776.25,1915.92 1773.52,1923.54 1771.55,1931.4 1770.36,1939.41 1770.09,1944.97 1770.09,1944.99 1770.1,3035 1770.09,3035.02 1770.37,3040.59 1771.56,3048.6 1773.52,3056.46 1776.25,3064.08 1779.72,3071.4 1783.88,3078.35 1788.7,3084.86 1794.14,3090.86 1800.14,3096.3 1806.65,3101.12 1813.6,3105.28 1820.92,3108.75 1828.54,3111.48 1836.4,3113.44 1844.41,3114.63 1849.97,3114.91 1849.99,3114.9 4305,3114.9 4305.02,3114.91